# Altium PCB Dormio_nrf52.PcbDoc
Units mil, origin at the board's own origin, x right, y up, seen from the top; angles counter-clockwise.
Board outline 1211 x 877 mil, 2 copper layers (Top Layer, Bottom Layer); 20 components, 18 nets, 108 pads, 14 vias.
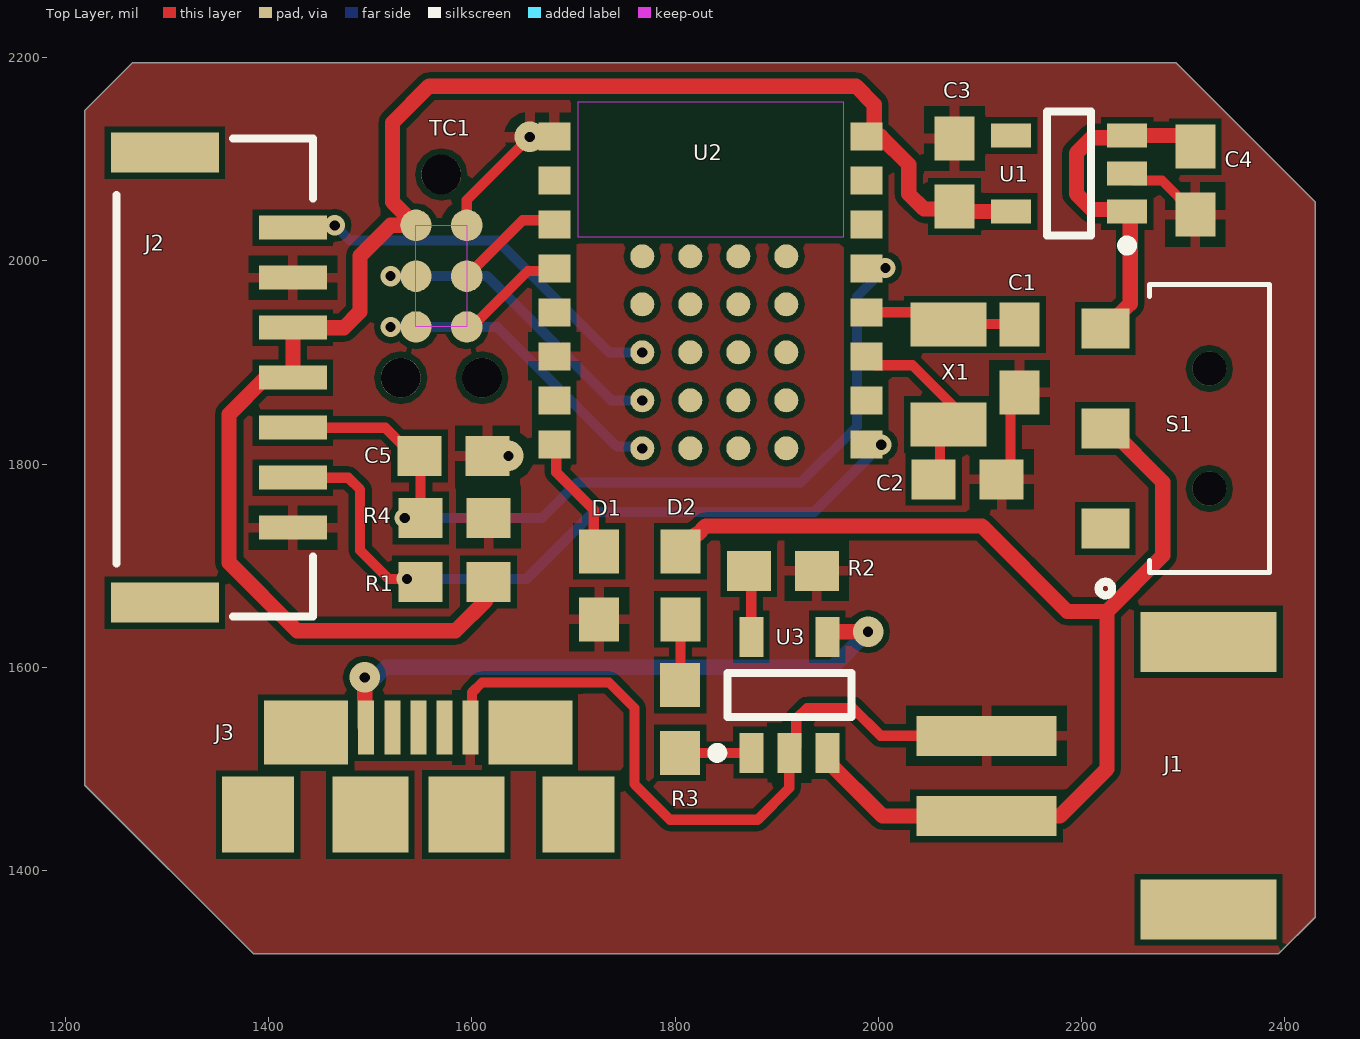
[diagram p0: Top Layer view]
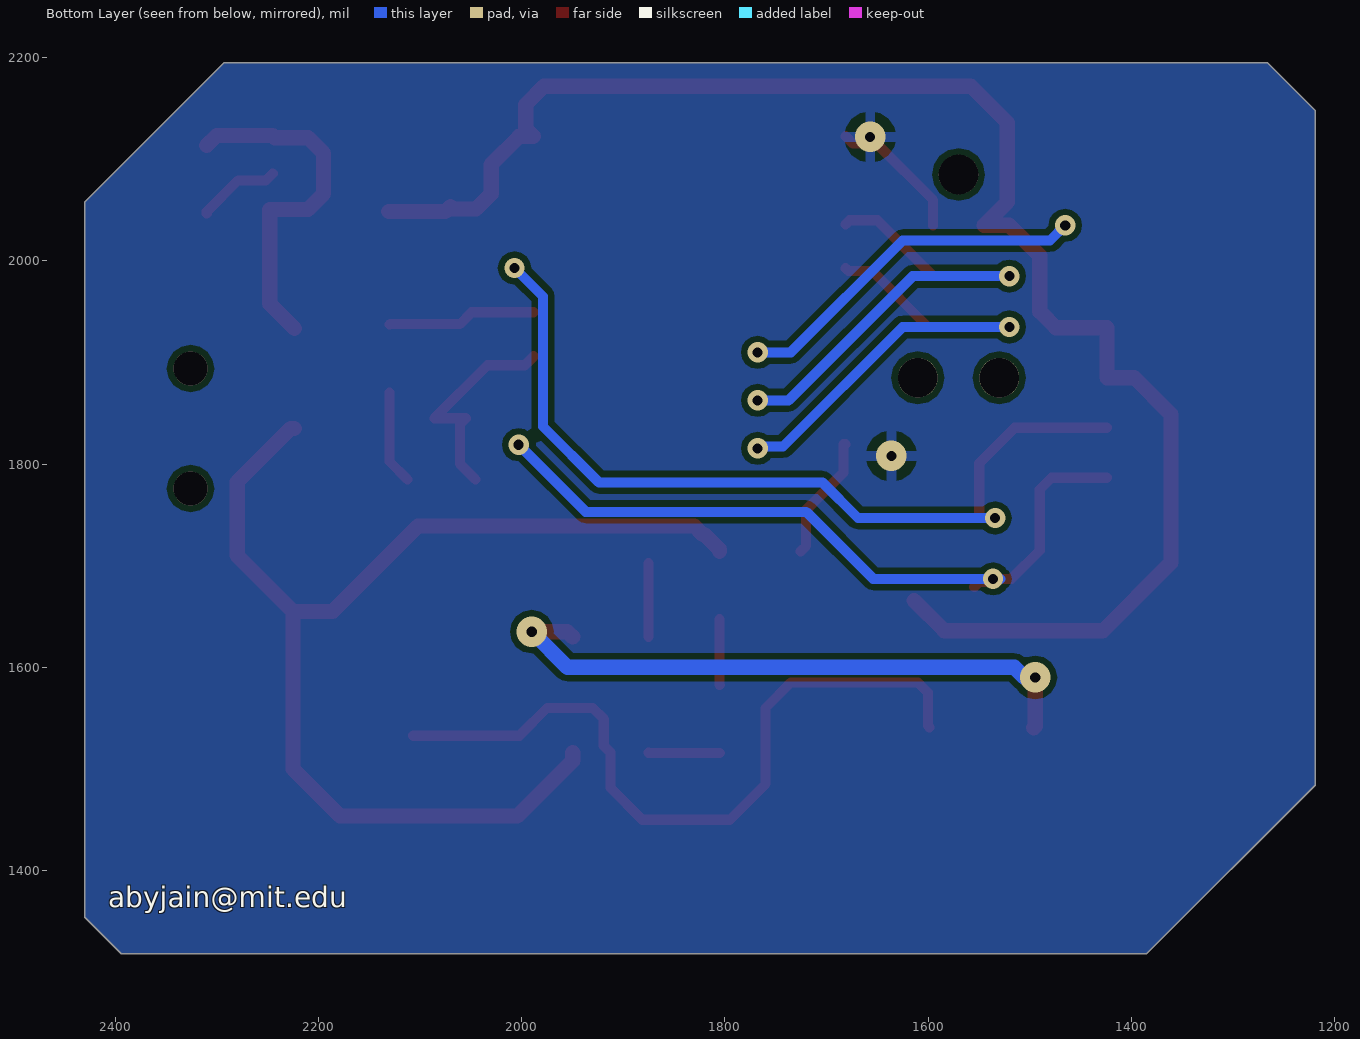
[diagram p1: Bottom Layer view, seen from below]
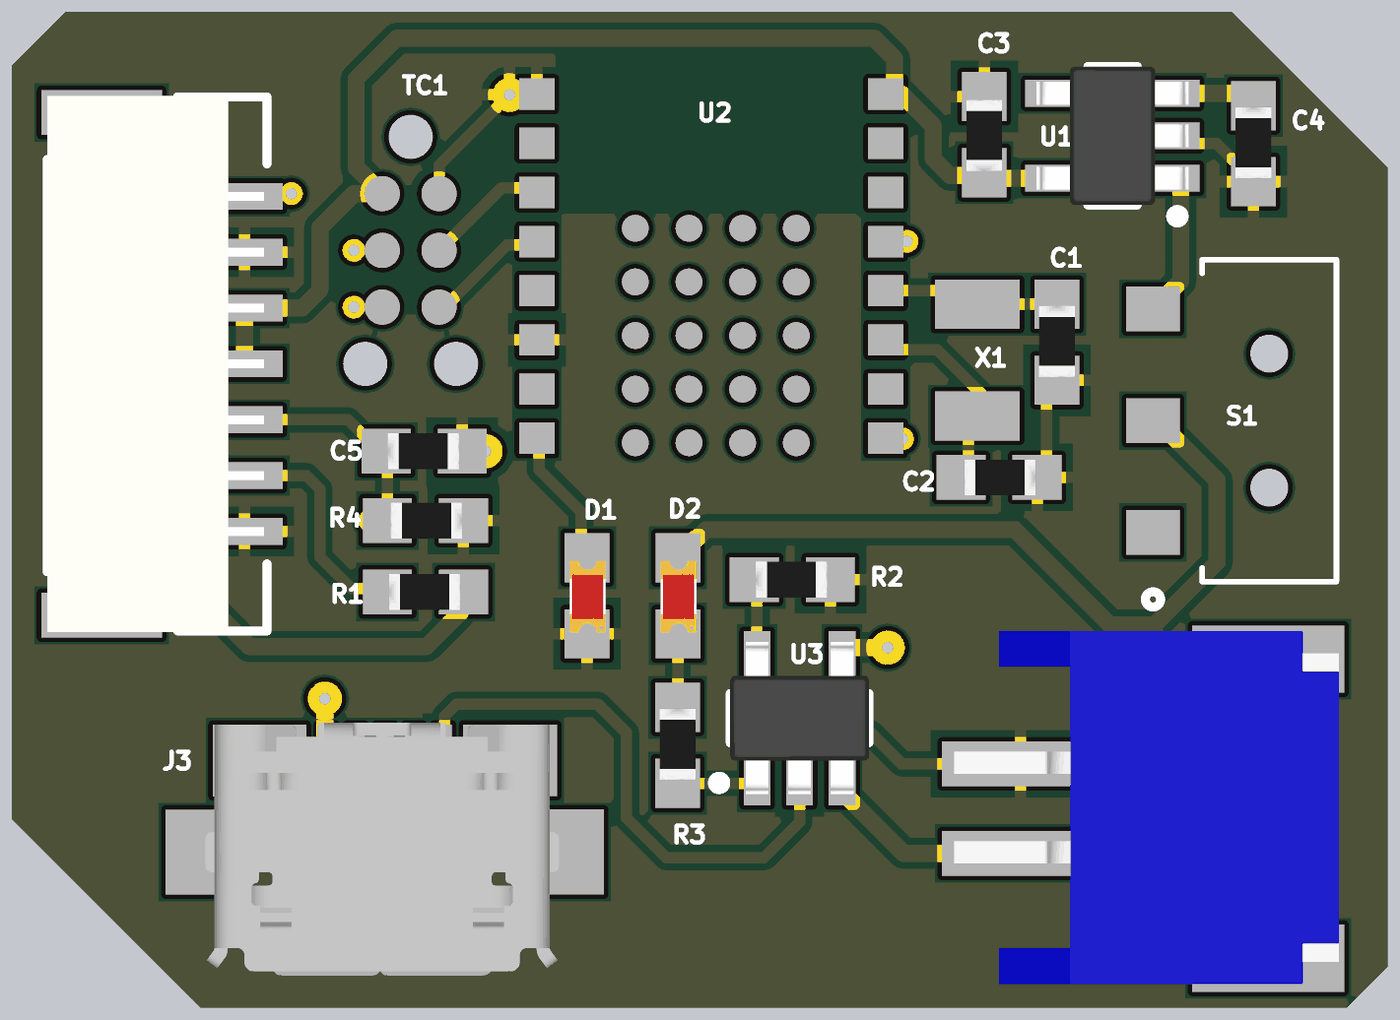
[diagram p2: 3D render of the assembled board from above, using the file's embedded part models]

## Layer stack, top to bottom
Top Solder: solder mask 0.4, Solder Resist, Dk 3.5
Top Layer: signal copper 1.4
Dielectric 1: dielectric 12.6, FR-4, Dk 4.8
Bottom Layer: signal copper 1.4
Bottom Solder: solder mask 0.4, Solder Resist, Dk 3.5

## Board outline
1219,1484 1219,2148 1266,2195 2293,2195 2430,2058 2430,1354 2394,1318 1385,1318

## Design rules (kind name [scope] priority, off if disabled: settings)
Clearance [All] p1: gap=6 ignorepadtopadclearanceinfootprint=FALSE
PolygonConnect [All] p1: connectstyle=Relief reliefconductorwidth=10 reliefentries=4 polygonreliefangle="90 Angle" airgapwidth=10
RoutingVias [All] p1: holewidth=15 width=30 viastyle="Through Hole" minholewidth=10 minwidth=20 maxholewidth=30 maxwidth=50
SolderMaskExpansion [All] p1: expansion=4
Width [All] p1: maxlimit=15 minlimit=6 preferedwidth=10
30 further rules are at their usual default settings.

## Components (designator, comment, footprint, x,y, rotation, side; value= is the part's Value field where it differs from the comment)
C1 "18pF" 0603W 2139,1905 r270 top
C2 "18pF" 0603W 2089,1785 r180 top
C3 "100uF Tant" 0603W 2075,2086 r90 top
C4 "10uF" 0603W 2312,2080 r270 top
C5 "0.1uF" 0603W 1581,1808 r0 top
D1 "LED" "0603 LED" 1725,1680 r90 top
D2 "LED" "0603 LED" 1805,1680 r90 top
J1 "JST PH 2" "JST PH 2" 2118.23,1467.32 r90 top
J2 "7 Pin" "JST SM07B-GHS-TB" 1350,1885 r90 top
J3 "microB USB Receptacle" "MicroB USB Standarad SMT" 1517.02,1589.01 r0 top
R1 "100k" 0603W 1582,1684 r0 top
R2 "1K" 0603W 1905,1695 r0 top
R3 "1K" 0603W 1805,1550 r270 top
R4 "100k" 0603W 1584,1747 r180 top
S1 "AYZ0102AGRLC" *SW_AYZ0102AGRLC 2320,1835 r90 top
TC1 "6 pin smd 1.27mm female" TC2030-IDC-NL 1570,1985 r270 top
U1 "MIC5205_VOLTAGE_REG" SOT-23-5 2245,2048.6 r180 top
U2 "BC832" BC832 1681.14,1795.08 r0 top
U3 "MCP73831" SOT-23-5 1875,1515.83 r90 top
X1 "32.768 Crystal" "32.768 Crystal" 2068.22,1934.74 r270 top

## Footprints (in the part's own frame and the unit in brackets; to place one, negate y for a bottom-side part, rotate by r counter-clockwise, add the part's x,y. Pads: shape width x height; smd on the part's side, far side on the other; paste and mask are expansions set on the pad)
"32.768 Crystal" [mm] "for BLE radio"
  rect 1.1x1.9 smd: 1(-0.07,0.019) 2(2.432,0.02)
  body extent -0.39,-0.71 2.81,0.78, height 0.9
"0603 LED" [mm]
  rect 1.1x1 smd: 1(0.868,-0.008) 2(-0.832,-0.008)
  body extent -0.8,-0.42 0.8,0.38, height 0.6
0603W [mm]
  rect 1.1x1 smd: 1(-0.825,0) 2(0.875,0)
  body extent -0.8,-0.4 0.8,0.4, height 0.45
*SW_AYZ0102AGRLC [mm]
  rect 1x1.2 smd: 1(-2.5,2.45) 2(0,2.45) 3(2.5,2.45)
  round 0.85 hole 0.85 unplated: None(-1.5,-0.15) None(1.5,-0.15)
  silkscreen extent -4.17,-1.65 3.6,2.62
BC832 [mil]
  rect 31.5x27.56 smd: P$1(0,327.56) P$2(0,284.25) P$3(0,240.94) P$4(0,197.64) P$5(0,154.33) P$6(0,111.02) P$7(0,67.72) P$8(0,24.41) P$9(307.09,24.41) P$10(307.09,67.72) P$11(307.09,111.02) P$12(307.09,154.33) P$13(307.09,197.64) P$14(307.09,240.94) P$15(307.09,284.25) P$16(307.09,327.56)
  rrect100% 23.62x23.62 smd: P$A1(86.61,209.41) P$A2(86.61,162.17) P$A3(86.61,114.92) P$A4(86.61,67.68) P$A5(86.61,20.43) P$B1(133.86,209.41) P$B2(133.86,162.17) P$B3(133.86,114.92) P$B4(133.86,67.68) P$B5(133.86,20.43) P$C1(181.1,209.41) P$C2(181.1,162.17) P$C3(181.1,114.92) P$C4(181.1,67.68) P$C5(181.1,20.43) P$D1(228.35,209.41) P$D2(228.35,162.17) P$D3(228.35,114.92) P$D4(228.35,67.68) P$D5(228.35,20.43)
"JST PH 2" [mm] "2mm pitch"
  rect 1x3.5 smd: 1(-0.346,0.295) 2(1.657,0.294)
  rect 1.5x3.4 smd: 3(-2.691,-5.251) 4(4.005,-5.252)
  body extent -3.27,-6.83 4.63,1.77, height 5.5
"JST SM07B-GHS-TB" [mm] "1.25mm pitch/Disconnectable Crimp style connectors"
  rect 0.6x1.7 smd: 1(-3.75,-1.875) 2(-2.5,-1.875) 3(-1.25,-1.875) 4(0,-1.875) 5(1.25,-1.875) 6(2.5,-1.875) 7(3.75,-1.875)
  rect 1x2.7 smd: M(-5.625,1.325) M(5.625,1.325)
  silkscreen extent -5.97,-2.37 5.97,2.54, body extent -6,-2.31 6,2.54, height 4.35
"MicroB USB Standarad SMT" [mm] "FOR ZX Series Hirose"
  rect 0.4x1.35 smd: 1(-0.533,-1.232) 2(0.119,-1.231) 3(0.769,-1.23) 4(1.419,-1.229) 5(2.069,-1.229)
  rect 1.8x1.9 smd: NC(-3.235,-3.405) NC(4.768,-3.403)
  rect 2.1x1.6 smd: NC(-2.033,-1.357) NC(3.568,-1.353)
  rect 1.9x1.9 smd: NC(-0.432,-3.404) NC(1.968,-3.403)
  body extent -3.25,-6.17 4.66,-0.51, height 2.78
SOT-23-5 [mm] "3D view"
  rect 1x0.6 smd: 1(0,0) 2(0,-0.95) 3(0,-1.9) 4(2.9,-1.9) 5(2.9,0)
  silkscreen extent -0.13,-2.5 2,0.97, body extent -0.25,-2.5 3.15,0.6, height 1.45
TC2030-IDC-NL [mil]
  round 39 hole 39 unplated: 1(-100,0) 1(100,40) 1(100,-40)
  rrect100% 31x31 smd: 1(-50,-25) 2(-50,25) 3(0,-25) 4(0,25) 5(50,-25) 6(50,25)
  Top Layer keep-out region: -50,-25 -50,25 50,25 50,-25

## Part data
C1 C2: library part Capacitor, "SMD Cap 0603"
C3 C4 C5: library part Capacitor, "SMD Cap 1206"
D1 D2: "LED SMD 1206/0603"
J1: Supplier Part Number 1=455-1749-6-ND, Supplier 1=Digikey
J3: digikey part number 2=609-4613-1-ND, manufacturer=ZX62-B-5PA(11), digikey=H11634CT-ND
R1 R2 R3 R4: library part Resistor
S1: "Switch Slide ON ON SPDT Side Slide 0.1A 12VDC 1.2VA 10000Cycles Gull Wing SMD T/R", Package=None, Availability=Unavailable, MF=C&K, MP=AYZ0102AGRLC, Price=None, SnapEDA_Link=https://www.snapeda.com/parts/AYZ0102AGRLC/C%26K/view-part/?ref=snap
U1: "5V LDO SMD", Sparkfun #=PRT-1125
U2: library part BC832-V1, DeviceSetName=BC832-V1, GateName_1=G$1, LibraryName=BC832, Package=BC832, SymbolName_1=BC832-V1
U3: "IC CONTROLLR LI-ION 4.2V SOT23-5", manufacturer=MCP73831T-2ACI/OT, digikey=MCP73831T-2ACI/OTCT-ND
TC1: digikey=S9005E-06-ND
X1: digikey number=XC1617CT-ND

## Via types
v1: diameter 20, hole 10, Top Layer to Bottom Layer, 10 vias
v2: diameter 30, hole 10, Top Layer to Bottom Layer, 4 vias

## Nets (pads, with @x,y where several pads share a name; then routed paths per layer and width w, separated by ;. In a path a pad name is that pad's centre, name@x,y a point inside that pad or via, vN(x,y) a via of type N, cw(c..) or ccw(c..) an arc to the next point about the centre after c; other vN are vias at no path point)
+5: J3.1 U3.4 | length 606.5
  Top Layer w15: v2(1494.49,1590.03) 1494.49,1542.06 J3.1 ; U3.4 1954.8,1635 v2(1990,1635)
  Bottom Layer w15: v2(1494.49,1590.03) 1505.03,1590.03 1515,1600 1955,1600 v2(1990,1635)
EDA: C5.1 J2.3 R4.2 U2.P$13 | length 844
  Top Layer w10: J2.3 1514.73,1835.79 1549.55,1800.97 R4.2
  Bottom Layer w10: v1(1534,1747) 1669,1747 1704,1782 1924,1782 1979,1837 1979,1965 v1(2007,1993)
FLEX: J2.2 R1.1 U2.P$9 | length 736.8
  Top Layer w10: J2.2 1478.43,1786.57 1490,1775 1490,1715 1518,1687 v1(1536,1687) ; R1.1@1537,1684 R1.1 R1.1@1554.52,1679
  Bottom Layer w10: v1@1529,1687 v1(1536,1687) 1654,1687 1720,1753 1937,1753 v1(2003,1819)
GND: C1.2 C2.1 C3.2 C4.2 C5.2 D1.2 J1.2 J2.1 J2.6 J3.5 R2.2 R4.1 TC1.2 U1.2 U2.P$1 U2.P$6 U3.2 | length 1050.8
  Top Layer w10: TC1.2 1595,2060 1650.39,2115.39 1673.89,2115.39 U2.P$1 ; J3.5 1600,1542.18 1600,1575 1610,1585 1735,1585 1760,1560 1760,1485 1795,1450 1881.26,1450 1912.4,1481.14 U3.2 1919.21,1522.64 1919.21,1549.21 1930,1560 1975,1560 2002.44,1532.56 J1.2 ; C2.1@2112.48,1785 2130,1802.52 C1.2@2130,1870.55 ; U1.2 2251.81,2079.19 2279.33,2079.19 2310,2048.52 C4.2@2310,2046.55
  other v2: 1636,1808 1657,2122
HR: J2.7 U2.P$A3 | length 354.5
  Bottom Layer w10: v1(1465,2035) 1480,2020 1625,2020 1735,1910 v1(1767.75,1910)
LED: D1.1 U2.P$8 | length 124.8
  Top Layer w10: U2.P$8 1683.11,1819.49 1683.11,1791.89 1720,1755 1720,1719.46 D1.1
NetD2_2: D2.2 R3.1 | length 64.9
  Top Layer w10: R3.1 1805.3,1582.78 D2.2
NetR2_1: R2.1 U3.5 | length 72.5
  Top Layer w10: U3.5 R2.1@1875,1702.52
NetR3_2: R3.2 U3.1 | length 70.1
  Top Layer w10: R3.2 1874.72,1515.55 U3.1
RX: TC1.5 U2.P$A5 | length 297.2
  Bottom Layer w10: v1(1520,1935) 1625,1935 1742.75,1817.25 1766.01,1817.25 v1(1767.75,1815.51)
SWCLK: TC1.6 U2.P$4 | length 110
  Top Layer w10: TC1.6 1600,1935 1655,1990 1678.42,1990 U2.P$4
SWDIO: TC1.4 U2.P$3 | length 110.6
  Top Layer w10: TC1.4 1650,2040 1677.16,2040 U2.P$3
TX: TC1.3 U2.P$A4 | length 298.4
  Bottom Layer w10: v1(1520,1985) 1615,1985 1737.24,1862.76 v1(1767.75,1862.76)
VBAT: C4.1 S1.3 U1.1 U1.3 | length 356
  Top Layer w15: S1.3 2248,1957.88 2248,2050.69 U1.1@2242.91,2050.69 ; U1.1 U1.1@2242.91,2050.69 ; C4.1@2310,2113.48 2300.08,2123.4 U1.3 2242.91,2121.31 2210.31,2121.31 2195,2106 2195,2066 2210.31,2050.69 U1.1@2242.91,2050.69
VBATIN: D2.1 J1.1 S1.2 U3.3 | length 1174.1
  Top Layer w15: D2.1 1805.3,1716.13 1819.99,1730.81 1821.96,1730.81 1830.15,1739 2102,1739 2186,1655 2225,1655 ; U3.3 1949.8,1507.95 2004.06,1453.7 J1.1 2178.7,1453.7 2225,1500 2225,1655 ; S1.2 2227.48,1835 2280,1782.48 2280,1710 2225,1655
VCC: C3.1 J2.4 J2.5 R1.2 TC1.1@1545,2035 U1.5 U2.P$16 | length 1594.7
  Top Layer w15: R1.2@1613.72,1665.72 1584,1636 1428,1636 1361,1703 1361,1849 1397,1885 J2.4 J2.5 1474.21,1934.21 1490,1950 1490,2005 1520,2035 1545,2035 1522,2058 1522,2136 1558,2172 1978,2172 1996,2154 1996,2130.41 U2.P$16 2002.36,2122.64 2030,2095 2030,2066 2045,2051 2067.48,2051 2070,2053.52 2074.92,2048.6 U1.5
XTAL1: C2.2 U2.P$11 X1.2 | length 222.7
  Top Layer w10: U2.P$11 1997.01,1897.32 2033.68,1897.32 2085.88,1845.12 2054.92,1845.12 2060.78,1839.26 2060.78,1800.23 C2.2@2045.55,1785
XTAL2: C1.1 U2.P$12 X1.1 | length 146.7
  Top Layer w10: U2.P$12 2049.09,1949.41 2060.75,1937.75 2129.73,1937.75 C1.1@2130,1937.48
pads on no net: J1.3 J1.4 J2.M J3.2 J3.3 J3.4 J3.NC S1.1 S1.None TC1.1@1530,1885 TC1.1@1570,2085 TC1.1@1610,1885 U1.4 U2.P$2 U2.P$5 U2.P$7 U2.P$10 U2.P$14 U2.P$15 U2.P$A1 U2.P$A2 U2.P$B1 U2.P$B2 U2.P$B3 U2.P$B4 U2.P$B5 U2.P$C1 U2.P$C2 U2.P$C3 U2.P$C4 U2.P$C5 U2.P$D1 U2.P$D2 U2.P$D3 U2.P$D4 U2.P$D5

## Polygon pours and split planes (outlines as drawn)
GND on Top Layer "GND_L01_P002" (solid, pour order 2): 1219,1484 1219,2148 1266,2195 2293,2195 2430,2058 2430,1354 2394,1318 1385,1318
GND on Bottom Layer "GND_L02_P003" (solid, pour order 3): 1219,1484 1219,2148 1266,2195 2293,2195 2430,2058 2430,1354 2394,1318 1385,1318

## Keep-outs
Top Layer:
  region: 1704,2156 1704,2148 1704,2024 1966,2024 1966,2156

## Silkscreen, mask and mechanical layers (free items; w line width, h text height)
Bottom Overlay:
  text "abyjain@mit.edu" at 2407,1364 h20
Mechanical 1:
  the board outline again, w10